# EAGLE board sch1 - Copy (EAGLE 8.4.3)
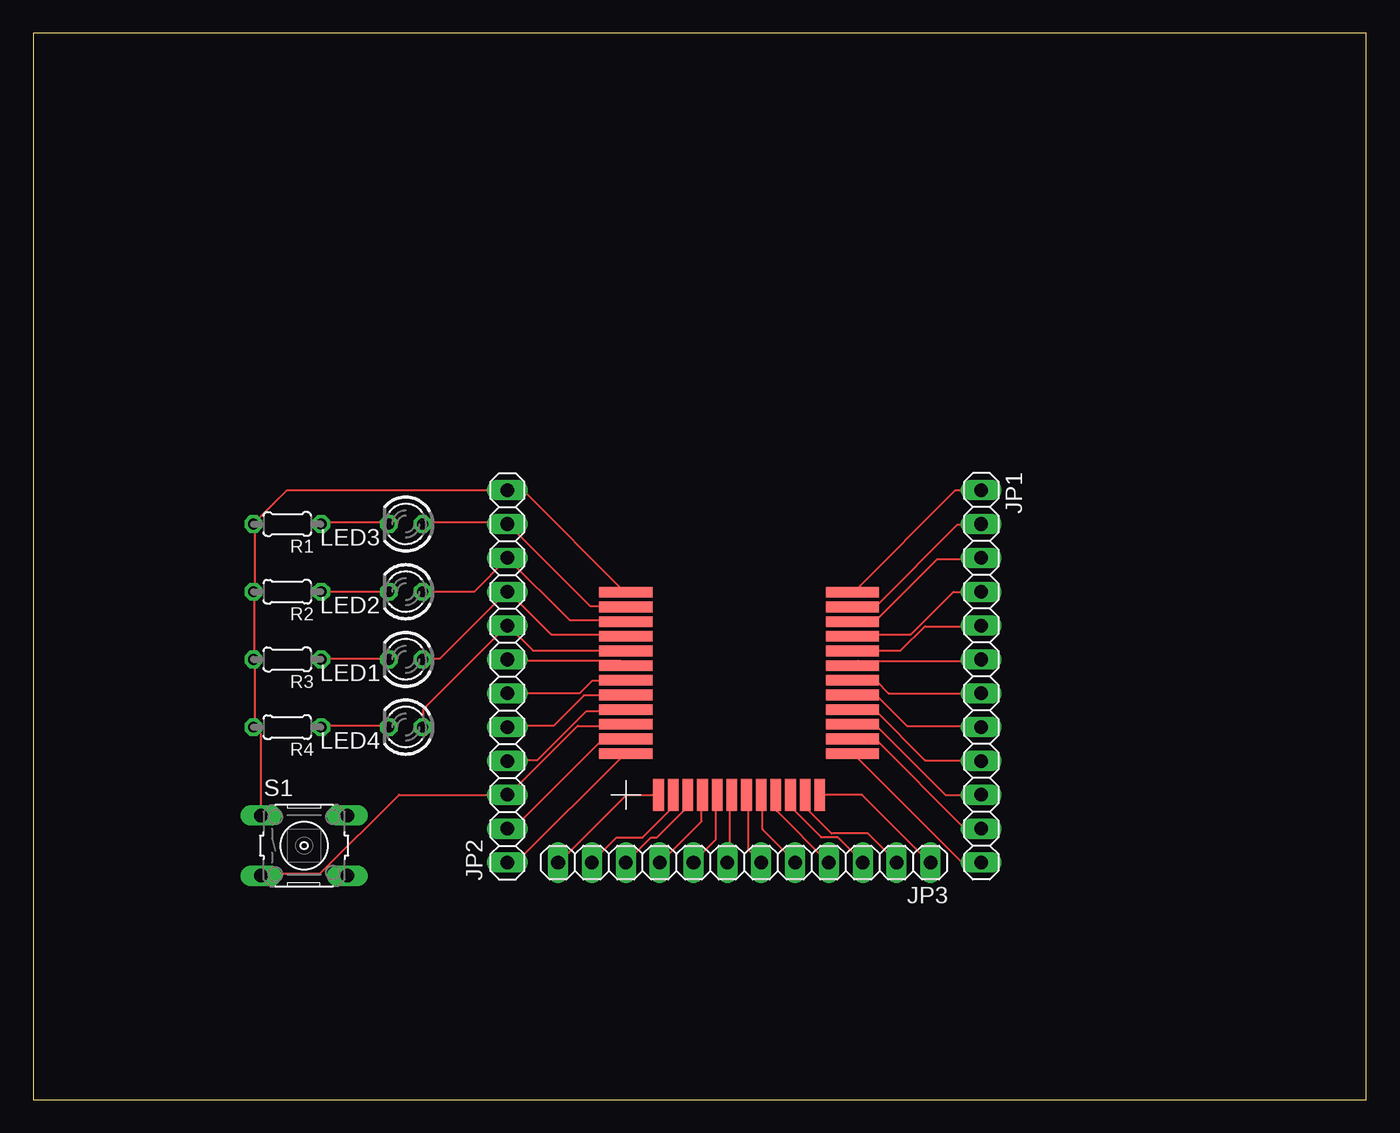
[diagram p0: board, top side]

Size 100 x 80 mm. Coordinates in mm from the lower left corner, seen from the top.
Outline: 0,0 100,0 100,80 0,80 0,0
Copper layers (1*16): Top 0.035mm / dielectric 1.5mm / Bottom 0.035mm
Design rules "default": minimum track width 6mil, minimum drill 0.35mm, track to track 6mil, track to pad 6mil, pad to pad 6mil, via to via 6mil, smd to smd 6mil, copper to edge 40mil, drill to drill 6mil, minimum pad ring 10mil, minimum via ring 8mil, stop-mask expansion 4mil, vias tented up to drill 0mil, thermal gap 10mil

## Footprints (pad centres in the part's own frame; a part is rotated, then mirrored left to right if it is on the bottom)
1X12 = drill 1.016 long: 1 -13.97,0; 2 -11.43,0; 3 -8.89,0; 4 -6.35,0; 5 -3.81,0; 6 -1.27,0; 7 1.27,0; 8 3.81,0; 9 6.35,0; 10 8.89,0; 11 11.43,0; 12 13.97,0
LED3MM = drill 0.813 octagon: A -1.27,0; K 1.27,0
0204/5 = drill 0.813 octagon: 1 -2.54,0; 2 2.54,0
B3F-10XX = drill 1.016 long: 1 -3.251,2.261; 2 3.251,2.261; 3 -3.251,-2.261; 4 3.251,-2.261
SMD_PAD_VERSION = smd 4 x 0.8: P$01 0,15.2; P$02 0,14.1; P$03 0,13; P$04 0,11.9; P$05 0,10.8; P$06 0,9.7; P$07 0,8.6; P$08 0,7.5; P$09 0,6.4; P$10 0,5.3; P$11 0,4.2; P$12 0,3.1; P$25 17,3.1; P$26 17,4.2; P$27 17,5.3; P$28 17,6.4; P$29 17,7.5; P$30 17,8.6; P$31 17,9.7; P$32 17,10.8; P$33 17,11.9; P$34 17,13; P$35 17,14.1; P$36 17,15.2 | smd 0.8 x 2.4: P$13 2.45,0; P$14 3.55,0; P$15 4.65,0; P$16 5.75,0; P$17 6.85,0; P$18 7.95,0; P$19 9.05,0; P$20 10.15,0; P$21 11.25,0; P$22 12.35,0; P$23 13.45,0; P$24 14.55,0

## Placement (x,y rotation side)
JP1  [1X12]  71.12,31.75 270 top
JP2  [1X12]  35.56,31.75 90 top
JP3  [1X12]  53.34,17.78 180 top
LED1  [LED3MM]  27.94,33.02 180 top
LED2  [LED3MM]  27.94,38.1 180 top
LED3  [LED3MM]  27.94,43.18 180 top
LED4  [LED3MM]  27.94,27.94 180 top
R1  [0204/5]  19.05,43.18 180 top
R2  [0204/5]  19.05,38.1 180 top
R3  [0204/5]  19.05,33.02 180 top
R4  [0204/5]  19.05,27.94 180 top
S1  [B3F-10XX]  20.32,19.05 0 top
U$1  HZX_MODULE  [SMD_PAD_VERSION]  44.45,22.86 0 top

## Library data of the parts
JP1-JP3 = pinhead
LED1-LED4 = led
R1-R4 = resistor
S1 = switch-omron; MPN: B3F-1000; OC_FARNELL: 176432; OC_NEWARK: 36M3542
U$1 = HZX_MODULE; AUTHOR: Agam

## Nets
N$1: JP1.1 U$1.P$36
N$2: JP1.2 U$1.P$35
N$3: JP1.3 U$1.P$34
N$4: JP1.4 U$1.P$33
N$5: JP1.5 U$1.P$32
N$6: JP1.6 U$1.P$31
N$7: JP1.7 U$1.P$30
N$8: JP1.8 U$1.P$29
N$9: JP1.9 U$1.P$28
N$10: JP1.10 U$1.P$27
N$11: JP1.11 U$1.P$26
N$12: JP1.12 U$1.P$25
N$13: JP2.1 U$1.P$12
N$14: JP2.2 U$1.P$11
N$15: JP2.3 S1.3 U$1.P$10
N$16: JP2.4 U$1.P$09
N$17: JP2.5 U$1.P$08
N$18: JP2.6 U$1.P$07
N$19: JP2.7 U$1.P$06
N$20: JP2.8 LED4.A U$1.P$05
N$21: JP2.9 LED1.A U$1.P$04
N$22: JP2.10 LED2.A U$1.P$03
N$23: JP2.11 LED3.A U$1.P$02
N$24: JP2.12 R1.2 R2.2 R3.2 R4.2 S1.1 U$1.P$01
N$25: JP3.1 U$1.P$24
N$26: JP3.2 U$1.P$23
N$27: JP3.3 U$1.P$22
N$28: JP3.4 U$1.P$21
N$29: JP3.5 U$1.P$20
N$30: JP3.6 U$1.P$19
N$31: JP3.7 U$1.P$18
N$32: JP3.8 U$1.P$17
N$33: JP3.9 U$1.P$16
N$34: JP3.10 U$1.P$15
N$35: JP3.11 U$1.P$14
N$36: JP3.12 U$1.P$13
N$38: LED4.K R4.1
N$39: LED1.K R3.1
N$40: LED2.K R2.1
N$41: LED3.K R1.1

## Tracks (layer width: path | path; a pad name or v marks a point on that pad's centre or on a via)
N$1
  Top 0.152: JP1.1 69.19,45.72 61.57,38.1 U$1.P$36
N$2
  Top 0.152: JP1.2 71.02,43.13 69.34,43.13 63.25,37.03 61.57,37.03 U$1.P$35
N$3
  Top 0.152: JP1.3 71.02,40.54 67.82,40.54 63.25,35.97 61.57,35.97 U$1.P$34
N$4
  Top 0.152: JP1.4 69.04,38.1 65.84,34.9 61.57,34.9 U$1.P$33
N$5
  Top 0.152: JP1.5 71.02,35.51 66.9,35.51 65.08,33.68 61.57,33.68 U$1.P$32
N$6
  Top 0.152: JP1.6 71.02,32.92 61.87,32.92 61.57,32.61 U$1.P$31
N$7
  Top 0.152: JP1.7 64.16,30.48 63.25,31.39 61.57,31.39 U$1.P$30
N$8
  Top 0.152: JP1.8 71.02,28.04 65.53,28.04 63.25,30.33 61.57,30.33 U$1.P$29
N$9
  Top 0.152: JP1.9 71.02,25.45 66.9,25.45 63.25,29.11 61.57,29.11 U$1.P$28
N$10
  Top 0.152: JP1.10 68.43,22.86 63.25,28.04 61.57,28.04 U$1.P$27
N$11
  Top 0.152: JP1.11 71.02,20.42 69.8,20.42 63.25,26.98 61.57,26.98 U$1.P$26
N$12
  Top 0.152: JP1.12 71.02,17.83 69.65,17.83 61.57,25.91 U$1.P$25
N$13
  Top 0.152: JP2.1 35.66,17.83 36.27,17.83 44.35,25.91 U$1.P$12
N$14
  Top 0.152: JP2.2 35.66,20.42 36.12,20.42 42.67,26.98 44.35,26.98 U$1.P$11
N$15
  Top 0.152: S1.3 17.07,16.92 21.49,16.92 27.43,22.86 JP2.3 35.66,22.86 40.84,28.04 44.35,28.04 U$1.P$10
N$16
  Top 0.152: JP2.4 35.66,25.45 37.8,25.45 41.45,29.11 44.35,29.11 U$1.P$09
N$17
  Top 0.152: JP2.5 35.66,28.04 39.01,28.04 41.3,30.33 44.35,30.33 U$1.P$08
N$18
  Top 0.152: JP2.6 41,30.48 41.91,31.39 44.35,31.39 U$1.P$07
N$19
  Top 0.152: JP2.7 35.66,32.92 44.04,32.92 44.35,32.61 U$1.P$06
N$20
  Top 0.152: LED4.A 29.26,28.04 29.26,29.26 JP2.8 35.66,35.51 37.49,33.68 44.35,33.68 U$1.P$05
N$21
  Top 0.152: LED1.A 29.26,33.07 30.48,33.07 35.51,38.1 JP2.9 35.66,38.1 38.86,34.9 44.35,34.9 U$1.P$04
N$22
  Top 0.152: LED2.A 33.07,38.1 35.51,40.54 JP2.10 40.23,35.97 44.35,35.97 U$1.P$03
N$23
  Top 0.152: LED3.A 29.26,43.28 35.51,43.28 JP2.11 35.66,43.13 41.76,37.03 44.35,37.03 U$1.P$02
N$24
  Top 0.152: U$1.P$01 44.35,38.1 36.73,45.72 JP2.12 19.05,45.72 R1.2 16.61,43.13 16.61,38.1 | S1.1 17.07,27.43 16.61,27.89 R4.2 16.61,28.04 16.61,32.92 R3.2 16.61,33.07 16.61,38.1 | 16.61,38.1 R2.2
N$25
  Top 0.152: U$1.P$24 62.18,22.86 67.21,17.83 JP3.1
N$26
  Top 0.152: U$1.P$23 57.91,22.86 57.91,21.95 59.89,19.96 62.64,19.96 64.77,17.83 JP3.2
N$27
  Top 0.152: JP3.3 60.35,19.66 59.13,19.66 56.84,21.95 56.84,22.86 U$1.P$22
N$28
  Top 0.152: U$1.P$21 55.78,22.86 55.78,21.64 59.59,17.83 JP3.4
N$29
  Top 0.152: U$1.P$20 54.71,22.86 54.71,20.27 57.15,17.83 JP3.5
N$30
  Top 0.152: JP3.6 53.65,18.75 53.65,22.86 U$1.P$19
N$31
  Top 0.152: JP3.7 52.27,17.98 52.27,22.86 U$1.P$18
N$32
  Top 0.152: U$1.P$17 51.21,22.86 51.21,19.51 49.53,17.83 JP3.8
N$33
  Top 0.152: U$1.P$16 50.14,22.86 50.14,20.88 47.09,17.83 JP3.9
N$34
  Top 0.152: JP3.10 46.33,19.66 46.79,19.66 49.07,21.95 49.07,22.86 U$1.P$15
N$35
  Top 0.152: U$1.P$14 47.85,22.86 47.85,21.79 45.72,19.66 43.74,19.66 41.91,17.83 JP3.11
N$36
  Top 0.152: U$1.P$13 44.5,22.86 39.47,17.83 JP3.12
N$38
  Top 0.152: R4.1 21.64,28.04 26.67,28.04 LED4.K
N$39
  Top 0.152: R3.1 21.64,33.07 26.67,33.07 LED1.K
N$40
  Top 0.152: LED2.K R2.1
N$41
  Top 0.152: R1.1 21.64,43.28 26.67,43.28 LED3.K